# Altium PCB KS1500-ST - V1.0.PcbDoc
Units mil, origin at the board's own origin, x right, y up, seen from the top; angles counter-clockwise.
Board outline 4820 x 1660 mil, 2 copper layers (Top Layer, Bottom Layer); 72 components, 97 nets, 319 pads, 118 vias.
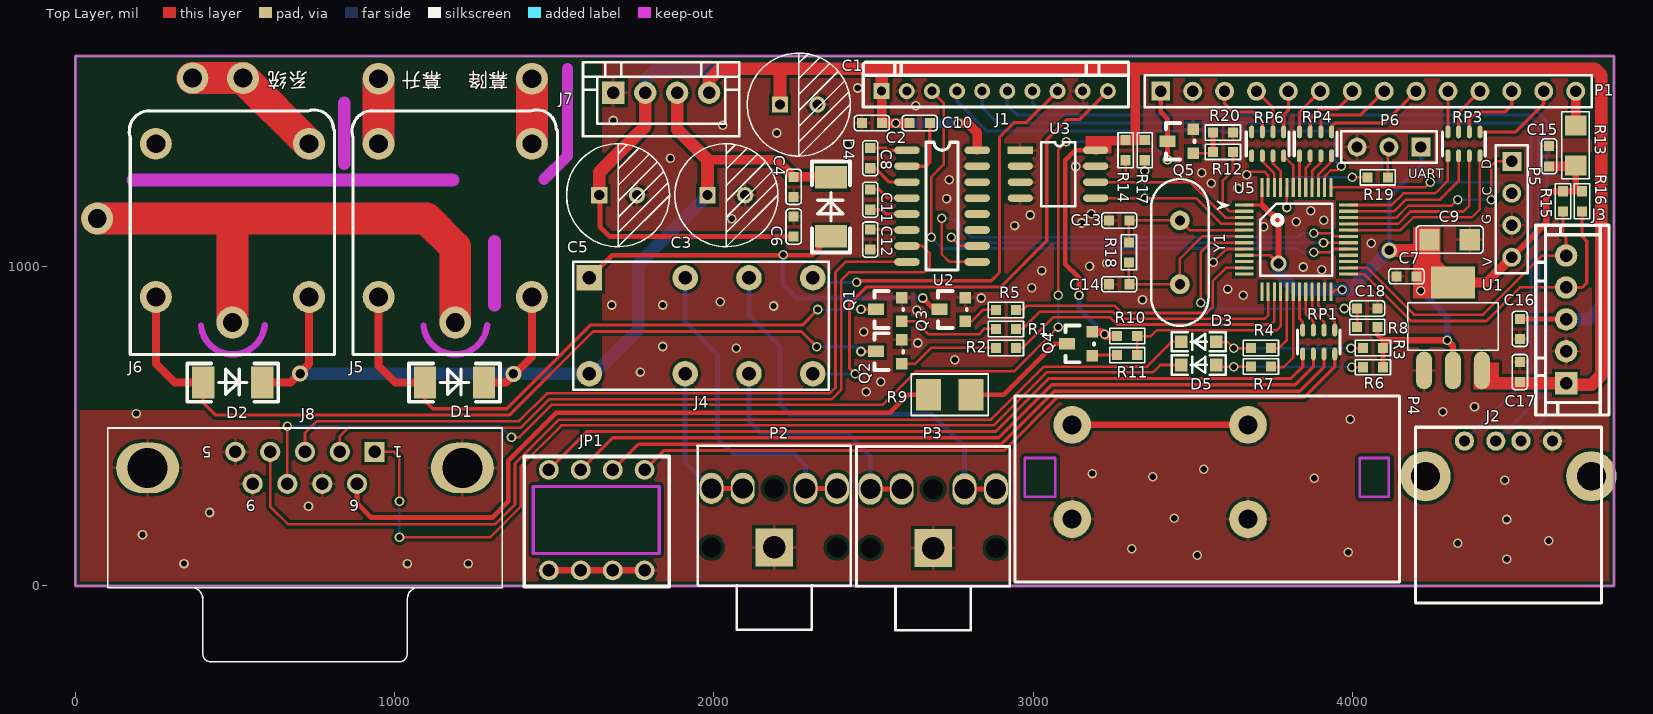
[diagram p0: Top Layer view]
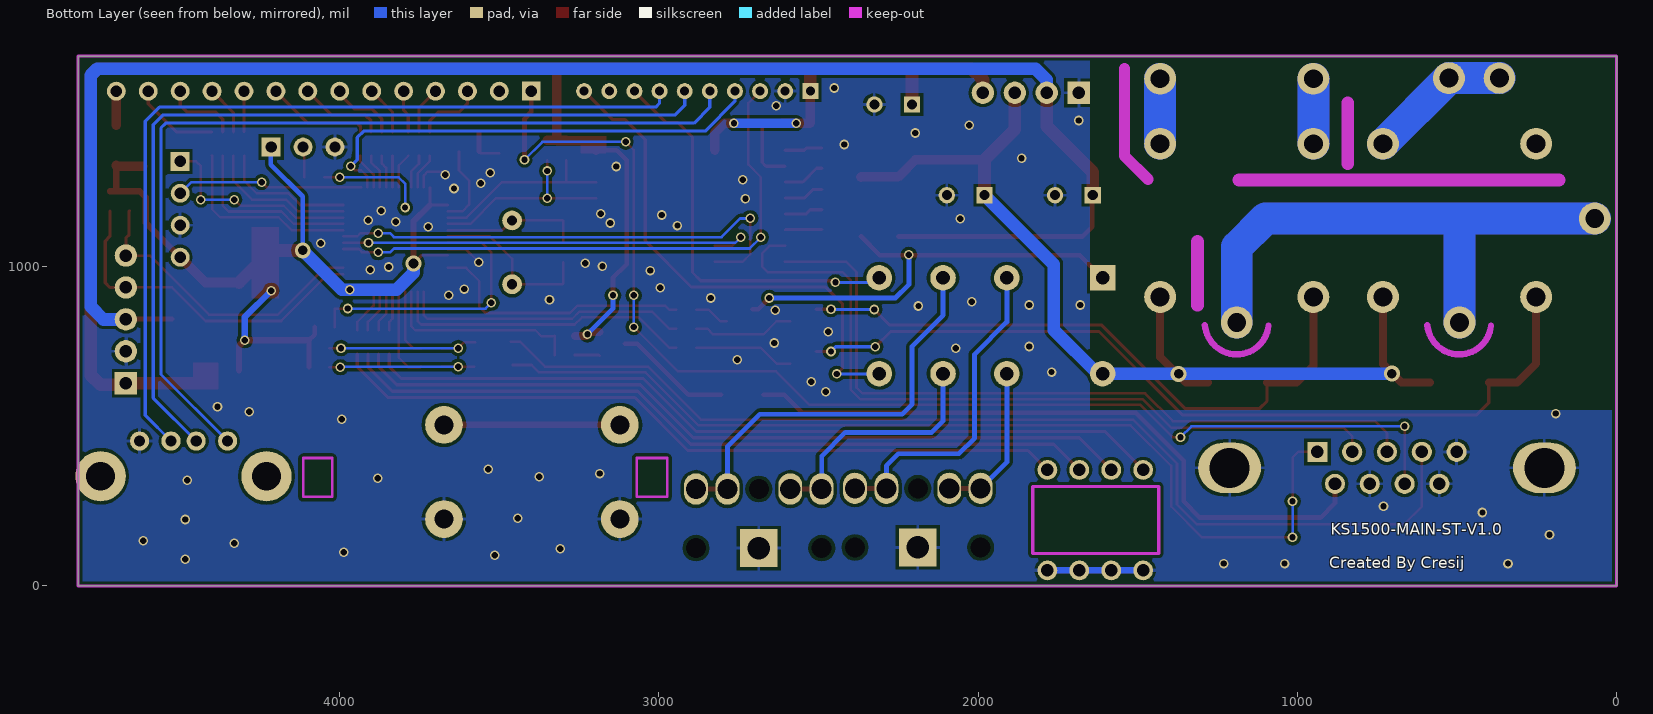
[diagram p1: Bottom Layer view, seen from below]

## Layer stack, top to bottom
Top Layer: signal copper 1.4
Dielectric: dielectric 12.6, FR-4, Dk 4.8
Bottom Layer: signal copper 1.4

## Board outline
0,0 0,1660 4820,1660 4820,0

## Design rules (kind name [scope] priority, off if disabled: settings)
Clearance [All] p1: gap=9
HoleSize [All] p1: absolutevalues=TRUE maxlimit=150 minlimit=1 maxpercent=80.000 minpercent=20.000
PolygonConnect [All vs IsVia] p1: connectstyle=Direct reliefconductorwidth=10 reliefentries=4 polygonreliefangle="90 Angle"
RoutingVias [All] p1: holewidth=28 width=50 viastyle="Through Hole" minholewidth=28 minwidth=50 maxholewidth=28 maxwidth=50
SilkscreenOverComponentPads [All] p1: minsilkscreentomaskgap=10
SolderMaskExpansion [All] p1: expansion=4
Width [All] p1: maxlimit=100 minlimit=8 preferedwidth=10 minimp=50.000000 maximp=50.000000 favimp=50.000000
26 further rules are at their usual default settings.

## Components (designator, comment, footprint, x,y, rotation, side; value= is the part's Value field where it differs from the comment)
C1 "470uF/25v" RB.4/Q8.2 2266,1514 r0 top locked
C2 "100NF/25V" C0603 2495,1450 r0 top locked
C3 "470uF/25v" RB.4/Q8.2 2039,1230 r0 top locked
C4 "100NF/25V" C0603 2250,1250 r90 top locked
C5 "470uF/25v" RB.4/Q8.2 1700,1230 r0 top locked
C6 "100NF/25V" C0603 2250,1126 r270 top locked
C7 "100NF" C0603 4170,970 r180 top locked
C8 "100NF/25V" C0603 2490,1340 r270 top locked
C9 "10UF" C1206 4305,1085 r0 top locked
C10 "100NF/25V" C0603 2645,1450 r180 top locked
C11 "100NF/25V" C0603 2490,1210 r90 top locked
C12 "100NF/25V" C0603 2490,1085 r270 top locked
C13 "22PF/5%" C0603 3270,1145 r0 top locked
C14 "22PF/5%" C0603 3270,945 r0 top locked
C15 "100NF/25V" C0603 4617,1346 r270 top locked
C16 "100NF/25V" C0603 4525,805 r270 top locked
C17 "100NF/25V" C0603 4525,670 r90 top locked
C18 "100NF/25V" C0603 4047,869 r0 top locked
D1 "IN4007" M7 1195,634 r0 top locked
D2 "IN4007" M7 500,634 r0 top locked
D3 "IN4148" SOD-123 3574,765 r180 top locked
D4 "IN4007" M7 2370,1195 r90 top locked
D5 "IN4148" SOD-123 3574,692.14 r180 top locked
J1 "Header 10" JP10-2.0 2880,1550 r0 top locked
J2 "USB" USB-1 4351.54,453.87 r0 top locked
J3 "Header 5" JP5-2.54 4670,635 r90 top locked
J4 "HK19F-DC 12V-SHG" RELAY-DPDT 1960,815 r180 top locked
J5 "RELAY-NT73-2C-10" RELAY-NT73-2C-10 1242,1133 r90 top locked
J6 "RELAY-NT73-2C-10" RELAY-NT73-2C-10 544,1133 r90 top locked
J7 "POWER" JP4-2.54 1985,1545 r0 top locked
J8 "DB9" DB9-RS232 643,137 r90 top locked
JP1 "SW-DIP4" SW-DIP4 1483,48.59 r0 top locked
P1 "Header 14" HDR1X14 3400,1550 r0 top locked
P2 "AUDIO-IN" AUDIO-D 2189,213 r0 top locked
P3 "AUDIO-OUT" AUDIO-D 2687,211 r0 top locked
P4 "VIDEO" VIDEO-1 3398,357 r0 top locked
P5 "DOWNLOAD" HDR1X4 4500,1330 r270 top locked
P6 "Download" HDR1X3 4215,1375 r180 top locked
Q1 "S8050" SOT23-S8050/8550 2562,873 r90 top locked
Q2 "S8050" SOT23-S8050/8550 2562,741 r90 top locked
Q3 "S8050" SOT23-S8050/8550 2761,873 r90 top locked
Q4 "S8550" SOT23-S8050/8550 3160,765 r90 top locked
Q5 "S8050" SOT23-S8050/8550 3475,1400 r90 top locked
R1 "4.7K" R0603 2915,805 r180 top locked
R2 "4.7K" R0603 2915,745.5 r180 top locked
R3 "10K" R0603 4065,745 r180 top locked
R4 "1K" R0603 3714,745 r0 top locked
R5 "4.7K" R0603 2915,864.5 r180 top locked
R6 "10K" R0603 4065,685 r180 top locked
R7 "1K" R0603 3714,687.14 r0 top locked
R8 "10K" R0603 4047,811 r180 top locked
R9 "100R" R1210 2739,599 r180 top locked
R10 "4.7K" R0603 3295,783 r180 top locked
R11 "4.7K" R0603 3295,723 r180 top locked
R12 "4.7K" R0603 3595,1360 r180 top locked
R13 "6R8" R1206 4700,1380 r270 top locked
R14 "10K" R0603 3290,1365 r270 top locked
R15 "4.7K" R0603 4660,1205 r90 top locked
R16 "4.7K" R0603 4720,1205 r90 top locked
R17 "10K" R0603 3350,1365 r270 top locked
R18 "1M/NC" R0603 3300,1045 r90 top locked
R19 "10K" R0603 4080,1280 r0 top locked
R20 "47K" R0603 3595,1420 r0 top locked
RP1 "1K/RES-4" RP2 3895,764 r90 top locked
RP3 "3.3K/RES-4" RP2 4350,1385 r270 top locked
RP4 "1K/RES-4" RP2 3885,1385 r270 top locked
RP6 "1K/RES-4" RP2 3735,1385 r270 top locked
U1 "LM1117-3.3" SOT223 4225,675 r0 top locked
U2 "MAX232" SO-16 2605,1365 r0 top locked
U3 "24C64" SOP8-4.4*5-1.27 2960,1365 r0 top locked
U5 "STM32F030C8T6" LQFP48/0.5/9*9 3825,1085 r0 top locked
Y1 "8.000MHz/2Pin" XTAL-0.2 3460,1145 r270 top locked

## Footprints (in the part's own frame and the unit in brackets; to place one, negate y for a bottom-side part, rotate by r counter-clockwise, add the part's x,y. Pads: shape width x height; smd on the part's side, far side on the other; paste and mask are expansions set on the pad)
AUDIO-D [mm]
  round 0 hole 1.6: 0(-5,-2.349) 0(0,2.349) 0(5,-2.349)
  oval 1.9x2.5 hole 1.6: 1(-5,2.349) 1(-2.5,2.349) 2(2.5,2.349) 2(5,2.349)
  rect 3x3 hole 1.8: 3(0,-2.349)
  silkscreen extent -6.12,-8.89 6.1,5.75
C0603 [mm]
  rect 0.8x0.8 smd: 1(-0.8,0) 2(0.8,0)
  silkscreen extent -1.4,-0.61 1.4,0.61
C1206 [mm]
  rect 1.6x1.7 smd: 1(-1.6,0) 2(1.6,0)
  silkscreen extent -2.67,-1.09 2.67,1.09
DB9-RS232 [mm]
  oval 4x5 hole 3.2: 0(5.912,10.591) 0(5.912,-14.453)
  rect 1.6x1.6 hole 1: 1(7.182,-7.468)
  round 1.6 hole 1: 2(7.182,-4.699) 3(7.182,-1.931) 4(7.182,0.838) 5(7.182,3.606) 6(4.642,-6.071) 7(4.642,-3.302) 8(4.642,-0.534) 9(4.642,2.235)
  silkscreen extent -9.51,-17.63 9.09,13.77
HDR1X3 [mm] "Connector; Header; 3 Position"
  rect 1.5x1.5 hole 0.9: 1(0,0)
  round 1.5 hole 0.9: 2(2.54,0) 3(5.08,0)
  silkscreen extent -1.27,-1.27 6.35,1.27
HDR1X4 [mm] "Connector; Header; 4 Position"
  rect 1.5x1.5 hole 0.9: 1(0,0)
  round 1.5 hole 0.9: 2(2.54,0) 3(5.08,0) 4(7.62,0)
  silkscreen extent -1.27,-1.27 8.89,1.27
HDR1X14 [mm] "Connector; Header; 14 Position"
  rect 1.5x1.5 hole 0.9: 1(0,0)
  round 1.5 hole 0.9: 2(2.54,0) 3(5.08,0) 4(7.62,0) 5(10.16,0) 6(12.7,0) 7(15.24,0) 8(17.78,0) 9(20.32,0) 10(22.86,0) 11(25.4,0) 12(27.94,0) 13(30.48,0) 14(33.02,0)
  silkscreen extent -1.27,-1.27 34.29,1.27
JP4-2.54 [mil]
  rect 70x70 hole 39.37: 1(-300,0)
  round 70 hole 39.37: 2(-200,0) 3(-100,0) 4(0,0)
  silkscreen extent -395,-136 95,95
JP5-2.54 [mil]
  rect 70x70 hole 39.37: 1(0,0)
  round 70 hole 39.37: 2(100,0) 3(200,0) 4(300,0) 5(400,0)
  silkscreen extent -100,-134 495,95
JP10-2.0 [mil]
  rect 50x50 hole 28: 1(-354.33,0)
  round 50 hole 28: 2(-275.59,0) 3(-196.85,0) 4(-118.11,0) 5(-39.37,0) 6(39.37,0) 7(118.11,0) 8(196.85,0) 9(275.59,0) 10(354.33,0)
  silkscreen extent -412,-50 419,91
LQFP48/0.5/9*9 [mm]
  rect 1.5x0.25 smd: 1(-4.15,2.75) 2(-4.15,2.25) 3(-4.15,1.75) 4(-4.15,1.25) 5(-4.15,0.75) 6(-4.15,0.25) 7(-4.15,-0.25) 8(-4.15,-0.75) 9(-4.15,-1.25) 10(-4.15,-1.75) 11(-4.15,-2.25) 12(-4.15,-2.75) 25(4.15,-2.75) 26(4.15,-2.25) 27(4.15,-1.75) 28(4.15,-1.25) 29(4.15,-0.75) 30(4.15,-0.25) 31(4.15,0.25) 32(4.15,0.75) 33(4.15,1.25) 34(4.15,1.75) 35(4.15,2.25) 36(4.15,2.75)
  rect 0.25x1.5 smd: 13(-2.75,-4.15) 14(-2.25,-4.15) 15(-1.75,-4.15) 16(-1.25,-4.15) 17(-0.75,-4.15) 18(-0.25,-4.15) 19(0.25,-4.15) 20(0.75,-4.15) 21(1.25,-4.15) 22(1.75,-4.15) 23(2.25,-4.15) 24(2.75,-4.15) 37(2.75,4.15) 38(2.25,4.15) 39(1.75,4.15) 40(1.25,4.15) 41(0.75,4.15) 42(0.25,4.15) 43(-0.25,4.15) 44(-0.75,4.15) 45(-1.25,4.15) 46(-1.75,4.15) 47(-2.25,4.15) 48(-2.75,4.15)
  silkscreen extent -6.3,-2.86 2.86,3.04
M7 [mil]
  rect 70x100 smd: 1(-100,3) 2(85,3)
  silkscreen extent -150,-57 135,63
R0603 [mm]
  rect 0.8x0.8 smd: 1(-0.8,0) 2(0.8,0)
  silkscreen extent -1.4,-0.61 1.4,0.61
R1206 [mm]
  rect 1.6x1.7 smd: 1(-1.6,0) 2(1.6,0)
  silkscreen extent -2.67,-1.09 2.67,1.09
R1210 [mm]
  rect 2x2.5 smd: 1(-1.7,0) 2(1.7,0)
  silkscreen extent -3.05,-1.65 3.05,1.65
RB.4/Q8.2 [mm]
  rect 1.3x1.3 hole 0.8: 1(-1.5,-0.152)
  round 1.3 hole 0.8: 2(1.5,-0.152)
  silkscreen extent -4.1,-4.25 4.1,3.95
RELAY-DPDT [mil]
  round 80 hole 43: 1(-350,150) 2(-150,150) 3(50,150) 4(-350,-150) 5(-150,-150) 6(50,-150) 7(350,150)
  rect 80x80 hole 43: 8(350,-150)
  silkscreen extent -400,-200 400,200
RELAY-NT73-2C-10 [mm]
  round 2.54 hole 1.5: 1(-7.818,1.326) 2(6.406,-4.77) 3(6.406,7.422) 4(-5.786,-4.77) 5(-5.786,7.422)
  silkscreen extent -10.36,-6.8 9.1,9.53
RP2 [mm]
  oval 1.016x0.4 smd: 1(-0.95,1.275) 2(-0.95,0.425) 3(-0.95,-0.425) 4(-0.95,-1.275) 5(0.95,-1.275) 6(0.95,-0.425) 7(0.95,0.425) 8(0.95,1.275)
  silkscreen extent -0.95,-1.7 0.95,1.7
SO-16 [mil]
  oval 80x24 smd: 1(0,0) 2(0,-50) 3(0,-100) 4(0,-150) 5(0,-200) 6(0,-250) 7(0,-300) 8(0,-350) 9(220,-350) 10(220,-300) 11(220,-250) 12(220,-200) 13(220,-150) 14(220,-100) 15(220,-50) 16(220,0)
  silkscreen extent 60,-375 160,25
SOD-123 [mm]
  rect 1x1 smd: 1(0,0) 2(2.8,0)
  silkscreen extent -0.76,-0.76 3.56,0.76
SOP8-4.4*5-1.27 [mm]
  rect 2x0.6 smd: 1(0,0)
  oval 2x0.6 smd: 2(0,-1.27) 3(0,-2.54) 4(0,-3.81) 5(6,-3.81) 6(6,-2.54) 7(6,-1.27) 8(6,0)
  silkscreen extent 1.68,-4.44 4.37,0.64
SOT23-S8050/8550 [mil]
  rect 36x36 smd: 1(-44.52,-26.15) 2(30.48,-26.15)
  rect 36x50 smd: 3(-6.52,53.85)
  silkscreen extent -65,-31 50,59
SOT223 [mm]
  oval 1.27x3 smd: 1(0,0) 2(2.3,0) 3(4.6,0)
  rect 3.5x2.54 smd: 4(2.3,7)
  silkscreen extent -1.3,1.6 5.9,5.4
SW-DIP4 [mil]
  round 62 hole 39: 1(0,0) 2(100,0) 3(200,0) 4(300,0) 5(300,314.96) 6(200,314.96) 7(100,314.96) 8(0,314.96)
  Keep-Out Layer lines w10: -49,52.96 -49,262.96 346,262.96 346,52.96 -49,52.96
  silkscreen extent -77,-50 377,357
USB-1 [mm]
  round 4 hole 2.3: 0(-3.1,-2.8) 0(10.1,-2.8)
  round 1.524 hole 0.9: 1(0,0) 2(2.5,0) 3(4.5,0) 4(7,0)
  silkscreen extent -3.9,-12.9 10.9,1.1
VIDEO-1 [mm]
  round 3 hole 1.5: 1(-7,3.75) 2(7,3.75) 3(-7,-3.75) 4(7,-3.75)
  Keep-Out Layer lines w0.203: -8.359,1.111 -10.772,1.111 -10.772,-1.987 -8.334,-1.987 -8.334,1.086 ; 18.184,1.111 15.898,1.111 15.898,-1.987 ; 18.209,1.086 18.209,-1.987 ; 15.898,-1.987 18.209,-1.987 ; 15.898,-1.987 18.209,-1.987
  silkscreen extent -11.55,-8.75 19.05,6.04
XTAL-0.2 [mil]
  round 62 hole 32: 1(0,0) 2(200,0)
  silkscreen extent -130,-90 330,90

## Part data
C1 C3 C5: library part "Cap Pol1", "Polarized Capacitor (Radial)"
C2 C4 C6 C13 C14: library part Cap, "Capacitor"
C7 C9: library part CAP, "Capacitor"
C8 C10 C11 C12 C15 C16 C17 C18: library part "Cap Semi", "Capacitor (Semiconductor SIM Model)"
D1 D2 D3 D4 D5: library part Diode, "Default Diode"
J1: "Header, 10-Pin"
J2 J7 P4 P5: library part "Header 4", "Header, 4-Pin"
J3: "Header, 5-Pin"
JP1: "DIP Switch"
P1: "Header, 14-Pin"
P2 P3 P6: library part "Header 3", "Header, 3-Pin"
R1 R2 R3 R4 R5 R6 R7 R8 R9 R10 R11 R12 R13 R14 R15 R16 R17 R18 R19 R20: library part Res1, "Resistor"
RP1 RP3 RP4 RP6: library part RES-4
U1: library part LM117
U5: library part STM32F030CX-LQFP48
Y1: library part CRYSTAL, "Crystal"

## Free pads (board coordinates)
  round 100 hole 59.05: 1(68,1151) 2(525,1591) 3(949.78,1589) 4(1429.78,1589)
  round 98.42 hole 59.05: 5(367,1591)

## Via types
v1: diameter 30, hole 20, Top Layer to Bottom Layer, 114 vias
v2: diameter 50, hole 30, Top Layer to Bottom Layer, 4 vias

## Nets (pads, with @x,y where several pads share a name; then routed paths per layer and width w, separated by ;. In a path a pad name is that pad's centre, name@x,y a point inside that pad or via, vN(x,y) a via of type N, cw(c..) or ccw(c..) an arc to the next point about the centre after c; other vN are vias at no path point)
232RX1: J8.3 U2.8 | length 2379
  Top Layer w8: J8.3 719.02,479 756.02,516 1390.09,516 1477.09,603 2362.54,603 2381,621.46 2381,983 2413,1015 U2.8
232TX1: J8.2 U2.7 | length 2442.6
  Top Layer w8: J8.2 828.02,469 855.02,496 1395.54,496 1484.54,585 2370,585 2399,614 2399,957 2424,982 2659,982 2677,1000 2677,1042 2654,1065 U2.7
+3V3: C7.1 C9.1 C15.2 P5.4 P6.1 R3.1 R6.1 R8.1 R13.2 R15.2 R16.2 U1.2 U1.4 U5.1 U5.9 U5.24 U5.48 | length 2950.1
  Top Layer w9: U5.9 3743.21,1035.79 v2(3769,1010) ; U5.1 3661.88,1193 3697.15,1193 3718,1193 3716.73,1194.27 U5.48 ; U5.24 3941.61,921.61 3948,928 v1(3969,928)
  Top Layer w15: R8.1 4078.5,787.5 4096.5,769.5 R3.1 R6.1
  Top Layer w20: 3718,1193 3769,1142 v2(3769,1010) ; 4096.5,769.5 v1(4297.5,769.5) 4315.55,751.45 U1.2 ; P5.4 4608,1138 4608,1218 4626.5,1236.5 R15.2 4700,1236.5 ; R13.2 4700,1236.5 ; R16.2 4700,1236.5
  Top Layer w30: U1.4 4420.59,950.59 P5.4 ; C15.2 4697.5,1314.5 R13.2
  Top Layer w40: v2(4116,1051) 4215.14,1051 4242.01,1024.13 ; C9.1 4242.01,1024.13 ; U1.4 4242.01,1024.13
  Bottom Layer w15: v2(4116,1051) 4116,1220 4216,1320 4216,1374 P6.1
  Bottom Layer w20: v1(4215,925) 4297.5,842.5 v1(4297.5,769.5)
  Bottom Layer w40: v2(3769,1010) 3769,981 3822,928 v1(3969,928) 3993,928 v2(4116,1051)
+5V: C1.1 C2.2 C10.2 C17.1 J1.1 J3.1 J7.4 Q4.2 R10.2 R14.1 R17.1 U1.3 U2.16 U3.8 | length 6115.5
  Top Layer w15: v1(3144,910) 3144,965 3101,1008 3101,1334 3132,1365 U3.8
  Top Layer w25: Q4.2 3214.52,795.48 3227,783 R10.2
  Top Layer w30: J1.1 2526.5,1549.17 C2.2 v1(2570,1450) C10.2 ; v1(2765,1450) 2795,1450 2825,1420 U2.16 ; U3.8 3196.22,1381.22 3210,1395 3318.5,1395 3320,1396.5 ; R14.1 3320,1396.5 ; 3315,1620 3320,1615 3320,1396.5 ; R17.1 3320,1396.5
  Top Layer w40: J7.4 1985,1585 2020,1620 2210,1620 ; C1.1 2206.94,1616.94 2210,1620 ; J1.1 2525.67,1619.33 2525,1620 ; U1.3 4446.1,635 J3.1 4675,630 4750,630 4780,660 4780,1600 4760,1620 3315,1620 2525,1620 ; 2210,1620 2525,1620
  Bottom Layer w15: v1(3144,910) 3144,868 v1(3224,788)
  Bottom Layer w30: v1(2570,1450) v1(2765,1450)
+12V: C3.1 C4.2 D1.2 D2.2 D4.2 J4.7 J5.4 J6.4 J7.3 | length 3151.1
  Top Layer w25: D2.2 674,637 731.78,694.78 J6.4 ; D1.2 1349,637 1429.78,717.78 J5.4
  Top Layer w30: 1979.94,1335.06 2196.44,1335.06 C4.2 2365.5,1281.5 D4.2
  Top Layer w40: J7.3 1885,1430 1979.94,1335.06 C3.1
  Bottom Layer w40: v2@702.89,665.89 v2(703.78,665) J4.7 1626,665 1763,802 1763,1007.06 C3.1
  other v2: 1372,664
-5V: C5.1 C6.2 C16.1 J3.3 J7.2 | length 5155.1
  Top Layer w15: C5.1 1643,1221.94 1643,1125 1673.5,1094.5 C6.2 ; C16.1 4668.5,836.5 J3.3
  Top Layer w40: C5.1 1640.94,1295.94 1785,1440 J7.2
  Bottom Layer w40: J7.2 1785,1585 1820,1620 4760,1620 4780,1600 4780,875 4740,835 J3.3
AC220V: J5.1 J6.1 pad.1 | length 3445.8
  Top Layer w100: pad.1 497,1151 ; J6.1 491.78,1145.78 497,1151 ; J5.1 1189.78,1061.22 1100,1151 497,1151
  Bottom Layer w100: pad.1 497,1151 ; J6.1 491.78,1145.78 497,1151 ; J5.1 1189.78,1061.22 1100,1151 497,1151
AUDIO_CON: R5.1 U5.11 | length 835.9
  Top Layer w8: R5.1 2967,864.5 2980.04,877.54 3256.46,877.54 3279,855 3544,855 3563,874 3563,955 3604.42,996.42 U5.11
CPU_RXD1: U2.9 U5.31 | length 1541.9
  Top Layer w8: v1(2714,1152) 2714,1039 2738,1015 U2.9 ; v1(3880,1105) 3935,1105 3945.16,1094.84 U5.31
  Bottom Layer w8: v1(2714,1152) 2715,1151 2746,1151 2804,1093 3830,1093 3842,1105 v1(3880,1105)
CPU_RXD2: U5.13
CPU_TXD1: U2.10 U5.30 | length 1343.7
  Top Layer w8: v1(2744,1092) 2771,1065 U2.10 ; v1(3910,1075) 3910.16,1075.16 U5.30
  Bottom Layer w8: v1(2744,1092) 2761,1075 v1(3910,1075)
CPU_TXD2: U5.12
DOWN: J5.3 pad.3 | length 407.6
  Top Layer w100: J5.3 pad.3
  Bottom Layer w100: J5.3 pad.3
GND: C1.2 C2.1 C3.2 C4.1 C5.2 C6.1 C7.2 C9.2 C12.2 C13.1 C14.1 C15.1 C16.2 C17.2 C18.2 J1.2 J1.9 J2.4 J3.2 J7.1 J8.0 J8.5 J8.7 J8.9 JP1.1 JP1.2 JP1.3 JP1.4 P1.2 P2.3 P3.3 P4.3 P4.4 P5.3 P6.3 Q1.2 Q2.2 Q3.2 Q5.2 R20.2 U1.1 U2.15 U3.1 U3.2 U3.3 U3.4 U3.7 U5.8 U5.23 U5.47 | length 827.8
  Top Layer w8: v1(3564,1014) 3605.47,1055.47 U5.8 ; v1(3670,1288) 3679.77,1297.77 3724.77,1297.77 3736.42,1286.13 U5.47
  Top Layer w20: JP1.1 JP1.4
  Bottom Layer w20: JP1.1 JP1.4
  other v1: 340,70 1040,70 1230,70 4484,83 3515,96 3988,106 3309,116 4331,134 4616,142 210,160 4484,208 3442,212 420,230 730,250 4478,331 3881,337 3375,342 3186,352 3535,365 3994,522 190,540 4284,546 4383,561 2477,608 2523,640 1770,670 2755,709 2070,745 1840,750 2639,761 2469,796 2636,864 2187,877 1680,880 1840,880 2020,890 3343,897 2838,902 3658,911 3610,930 2996,934 3027,988 3905,991 3846,999 3177,1002 3231,1011 4059,1074 3723,1125 2942,1129 3152,1137 3824,1141 3911,1145 2056,1150 2991,1162 3182,1166 3870,1175 2729,1213 3642,1245 3558,1261 2738,1273 3529,1294 3134,1314 1864,1340 2419,1383 2197,1419 2028,1443 1685,1458 2633,1504 2451,1560
IO_CON1: J3.4 R16.1 U5.25 | length 1086.8
  Top Layer w8: U5.25 4037.27,976.73 4184,830 4420,830 4525,935 J3.4
  Top Layer w10: J3.4 4720,935 4735,950 4735,1080 4720,1095 R16.1
IO_CON2: J3.5 R15.1 U5.26 | length 963.7
  Top Layer w8: U5.26 4047.58,996.42 4194,850 4410,850 4595,1035 J3.5 ; R15.1@4658.5,1175 R15.1
  Top Layer w10: R15.1 4660,1100 4670,1090 J3.5
IO_OFF: R4.2 U5.17 | length 211.7
  Top Layer w8: R4.2 3770,745 3795.47,770.47 U5.17
IO_ON: R7.2 U5.18 | length 289.5
  Top Layer w8: R7.2 3747.64,685 3785,685 3815.16,715.16 U5.18
IR_IN: J1.3 U5.29 | length 1820.6
  Top Layer w8: v1(2681,1092) 2681,1280.89 2720,1319.89 2720,1513.15 J1.3 ; v1(3880,1045) 3881,1046 3931,1046 3940.47,1055.47 U5.29
  Bottom Layer w8: v1(2681,1092) 2716,1057 3830,1057 3842,1045 v1(3880,1045)
IR_LED: J1.4 U5.38 | length 1459.5
  Top Layer w8: U5.38 3913.58,1283.13 3932.73,1302.27 3952.27,1302.27 v1(3965,1315)
  Bottom Layer w10: J1.4 2761.89,1518.11 2855,1425 3925,1425 3945,1405 3945,1335 v1(3965,1315)
IR_OUT: R10.1 R11.1 U5.16 | length 631.3
  Top Layer w8: R11.1 R10.1 3327.5,782 3368,782 3387,801 3764,801 3775.79,812.79 U5.16
IR_OUT_PORT: J8.6 R9.2 | length 2103.8
  Top Layer w15: J8.6 882.02,258.98 927,214 1305,214 1355.5,264.5 1355.5,392.36 1505.64,542.5 2550.5,542.5 2607,599 R9.2
KEY_IN1: RP4.8 U5.39 | length 116.3
  Top Layer w8: U5.39 3893.9,1288.9 3935.2,1330.2 RP4.8
KEY_IN2: RP4.7 U5.40 | length 110.6
  Top Layer w8: U5.40 3874.21,1299.21 3901.73,1326.73 RP4.7
KEY_IN3: RP4.6 U5.41 | length 104.9
  Top Layer w8: U5.41 3854.53,1309.53 3868.27,1323.27 RP4.6
KEY_IN4: RP4.5 U5.42 | length 99.2
  Top Layer w8: RP4.5 RP4.5 U5.42
KEY_OUT1: RP6.8 U5.43 | length 111.6
  Top Layer w8: RP6.8 3815.16,1317.64 U5.43
KEY_OUT2: RP6.7 U5.45 | length 109.2
  Top Layer w8: RP6.7 3751.73,1323.27 3775.79,1299.21 U5.45
KEY_OUT3: RP6.6 U5.46 | length 114.9
  Top Layer w8: RP6.6 3718.27,1329.73 3756.1,1291.9 U5.46
LAPTOP_IN_L: J1.8 J4.4 | length 1268.6
  Top Layer w10: v1(2447,951) 2452,956 2869,956 2895,982 2895,1405 2942,1452 2978.85,1452 J1.8
  Bottom Layer w10: J4.4 2324,951 v1(2447,951)
LAPTOP_IN_R: J1.10 J4.1 | length 1642.1
  Top Layer w10: v1(2443,664) 2425,682 2425,884 2477,936 2898,936 3043,1081 3043,1398 3106,1461 3145.33,1461 J1.10 J1.10@3224,1550
  Bottom Layer w10: J4.1 2311,664 v1(2443,664)
LED1: RP3.8 U5.32 | length 606.4
  Top Layer w8: U5.32 4151.01,1114.53 4191.48,1155 4375,1155 4400,1180 4400,1347.4 RP3.8
LED2: RP3.7 U5.33 | length 558
  Top Layer w8: U5.33 4144.21,1134.21 4183,1173 4348,1173 4366.73,1191.73 RP3.7
LED3: RP3.6 U5.35 | length 463.4
  Top Layer w8: U5.35 4131.42,1173.58 4167.84,1210 4275,1210 4333.27,1268.27 RP3.6
LED4: RP3.5 U5.36 | length 420.9
  Top Layer w8: U5.36 4123.27,1193.27 4160,1230 4260,1230 4299.8,1269.8 RP3.5
NetC8_1: C8.1 U2.1 | length 117.7
  Top Layer w10: C8.1 2538.5,1371.5 2545,1365 U2.1
NetC8_2: C8.2 U2.3 | length 133
  Top Layer w10: C8.2 2506.5,1308.5 2550,1265 U2.3
NetC10_1: C10.1 U2.2 | length 199.8
  Top Layer w10: U2.2 2665,1315 2676.5,1326.5 C10.1
NetC11_1: C11.1 U2.5 | length 120.6
  Top Layer w10: C11.1 2526.5,1178.5 2540,1165 U2.5
NetC11_2: C11.2 U2.4 | length 126
  Top Layer w10: C11.2 2518.5,1241.5 2545,1215 U2.4
NetC12_1: C12.1 U2.6 | length 115.6
  Top Layer w10: C12.1 2603.5,1116.5 U2.6
NetD1_1: D1.1 J5.5 Q1.3 | length 1993.2
  Top Layer w10: D1.1 1095,579 1119,555 1351,555 1613,817 2277,817 v1(2326,866) ; v1@2461,866.48 Q1.3
  Top Layer w25: J5.5 949.78,689.22 1002,637 D1.1
  Bottom Layer w10: v1(2326,866) 2460,866 v1(2461,867)
NetD2_1: D2.1 J6.5 Q2.3 | length 2703.5
  Top Layer w10: D2.1 400,574 439,535 1359.28,535 1621.28,797 2274,797 v1(2322,749) ; v1(2461,734.48) Q2.3
  Top Layer w25: J6.5 251.78,696.22 311,637 D2.1
  Bottom Layer w10: v1(2322,749) 2446.48,749 v1(2461,734.48)
NetD3_1: D3.1 R3.2 R4.1 | length 519.9
  Top Layer w8: D3.1@3575,764 3610,764 v1(3629,745) R4.1 ; v1(3996,745) R3.2
  Bottom Layer w8: v1(3629,745) v1(3996,745)
NetD3_2: D3.2 J8.4 | length 3359.9
  Top Layer w8: J8.4 610.02,248.98 666.5,192.5 1313.91,192.5 1377,255.59 1377,383.46 1514.54,521 2868.67,521 3034.67,687 3357,687 3435,765 D3.2
NetD4_1: D4.1 J4.8 Q3.3 | length 1426.1
  Top Layer w15: J4.8 1681,1036 2308,1036 D4.1 ; v1(2654,902) 2689.52,866.48 Q3.3
  Bottom Layer w15: v1(2217,1037) 2217,944 2259,902 v1(2654,902)
NetD5_1: D5.1 R6.2 R7.1 | length 508.9
  Top Layer w8: D5.1@3579,687.14 v1(3629,687.14) R7.1 ; v1(3998,685) R6.2
  Bottom Layer w8: v1(3629,687.14) 3995.86,687.14 v1(3998,685)
NetD5_2: D5.2 J8.1 | length 3077.5
  Top Layer w8: J8.1 997.25,419.75 1015,402 v1(1015,265) ; v1(1015,152) 1298.86,152 1395,248.14 1395,376 1522,503 2876.13,503 3042.13,669 3376,669 3399.14,692.14 D5.2@3458.5,692.14
  Bottom Layer w8: v1(1015,152) v1(1015,265)
NetJ1_5: J1.5 J2.1 | length 2864.1
  Bottom Layer w10: J1.5 2840.63,1499.37 2890,1450 4545,1450 4560,1435 4560,662.33 J2.1
NetJ1_6: J1.6 J2.2 | length 2781.5
  Bottom Layer w10: J1.6 2919.37,1505.63 2950,1475 4554.64,1475 4584.5,1445.15 4584.5,588.4 J2.2
NetJ1_7: J1.7 J2.3 | length 2707.9
  Bottom Layer w10: J1.7 2998.11,1511.89 3010,1500 4565,1500 4609.5,1455.5 4609.5,534.66 J2.3
NetJ4_2: J4.2 P3.1 | length 775.6
  Top Layer w15: P3.1@2490.15,303.5 P3.1@2588.58,303.5
  Bottom Layer w15: J4.2 2110,517 2146,481 2416,481 2490.15,406.85 P3.1@2490.15,303.5
NetJ4_3: J4.3 P2.1 | length 492
  Top Layer w15: P2.1@1992.15,305.5 P2.1@2090.58,305.5
  Bottom Layer w15: J4.3 1910,387.65 P2.1@1992.15,305.5
NetJ4_5: J4.5 P3.2 | length 1301
  Top Layer w15: P3.2@2785.42,303.5 P3.2@2883.85,303.5
  Bottom Layer w15: J4.5 2110,848 2207,751 2207,569 2238,538 2684,538 2785.42,436.57 P3.2@2785.42,303.5
NetJ4_6: J4.6 P2.2 | length 1025.6
  Top Layer w15: P2.2@2287.42,305.5 P2.2@2385.85,305.5
  Bottom Layer w15: J4.6 1910,827 2011,726 2011,463 2060,414 2250,414 2287.42,376.57 P2.2@2287.42,305.5
NetJP1_5: JP1.5 RP1.4 | length 2335.9
  Top Layer w10: JP1.5 1843.45,424 2908.85,424 3074.85,590 3848.47,590 3945.2,686.73 RP1.4
NetJP1_6: JP1.6 RP1.3 | length 2402.5
  Top Layer w10: JP1.6 1763.45,444 2900.57,444 3066.57,610 3835,610 3911.73,686.73 RP1.3
NetJP1_7: JP1.7 RP1.2 | length 2469
  Top Layer w10: JP1.7 1683.45,464 2892.28,464 3058.28,630 3821.54,630 3878.27,686.73 RP1.2
NetJP1_8: JP1.8 RP1.1 | length 2535.5
  Top Layer w10: JP1.8 1603.45,484 2884,484 3050,650 3808.07,650 3844.8,686.73 RP1.1
NetP1_3: P1.3 RP6.3 | length 214.7
  Top Layer w10: P1.3 3600,1510 3625,1485 3690,1485 3718.27,1456.73 RP6.3
NetP1_4: P1.4 RP6.2 | length 149
  Top Layer w10: P1.4 3751.73,1498.27 RP6.2
NetP1_5: P1.5 RP6.1 | length 133.7
  Top Layer w10: RP6.1 3785.2,1475.2 3800,1490 P1.5
NetP1_6: P1.6 RP4.4 | length 154.6
  Top Layer w10: RP4.4 3834.8,1484.8 P1.6
NetP1_7: P1.7 RP4.3 | length 214.4
  Top Layer w10: RP4.3 3868.27,1463.27 3900,1495 3955,1495 4000,1540 P1.7
NetP1_8: P1.8 RP4.2 | length 271.2
  Top Layer w10: RP4.2 3901.73,1456.73 3920,1475 4025,1475 P1.8
NetP1_9: P1.9 RP4.1 | length 328.1
  Top Layer w10: RP4.1 3935.2,1440.2 3945,1450 4100,1450 P1.9
NetP1_10: P1.10 RP3.4 | length 127.7
  Top Layer w8: P1.10@4299.8,1549.8 P1.10
  Top Layer w10: RP3.4 P1.10@4299.8,1549.8
NetP1_11: P1.11 RP3.3 | length 155.2
  Top Layer w10: RP3.3 4333.27,1483.27 P1.11
NetP1_12: P1.12 RP3.2 | length 235.5
  Top Layer w10: RP3.2 4366.73,1461.73 4390,1485 4480,1485 4500,1505 P1.12
NetP1_13: P1.13 RP3.1 | length 276.1
  Top Layer w10: RP3.1 4512.4,1422.4 4600,1510 P1.13
NetP1_14: P1.14 R13.1 | length 107
  Top Layer w30: R13.1 P1.14
NetP4_1: P4.1 P4.2 | length 551.2
  Top Layer w20: P4.1 P4.2
NetP6_2: P6.2 R19.2 | length 96.5
  Top Layer w8: R19.2 4111.5,1371.5 P6.2
NetQ1_1: Q1.1 R1.2 | length 319.2
  Top Layer w8: Q1.1 2632.52,828.48 2673,788 2830,788 2847,805 R1.2
NetQ2_1: Q2.1 R2.2 | length 315.7
  Top Layer w8: Q2.1 2631.48,696.48 2680.5,745.5 R2.2
NetQ3_1: Q3.1 R5.2 | length 111.3
  Top Layer w8: Q3.1 2807.48,828.48 2843.5,864.5 R5.2
NetQ4_1: Q4.1 R11.2 | length 78.4
  Top Layer w8: Q4.1 Q4.1@3188.67,723
  Top Layer w10: Q4.1@3188.67,723 R11.2
NetQ4_3: Q4.3 R9.1 | length 366.3
  Top Layer w15: R9.1 2908,599 3067.48,758.48 Q4.3
NetQ5_1: Q5.1 R12.2 R20.1 | length 124.2
  Top Layer w8: Q5.1 3558.98,1355.48 R12.2
  Top Layer w15: R12.2 R20.1
NetR19_1: R19.1 U5.44 | length 398.9
  Top Layer w8: v1(3795.47,1185.47) U5.44 ; v1(4000,1280) R19.1
  Bottom Layer w8: v1(3795.47,1185.47) 3795.47,1260.32 3815.16,1280 v1(4000,1280)
NRST: C18.1 R8.2 U5.7 | length 862.5
  Top Layer w8: v1(3525,887) 3525,1044 3556.16,1075.16 U5.7 ; v1(3975,869) C18.1 R8.2
  Bottom Layer w8: v1(3525,887) 3543,869 v1(3975,869)
OSC_IN: C13.2 R18.2 U5.5 Y1.1 | length 441.9
  Top Layer w8: R18.2 3300,1143.5 C13.2 Y1.1 3490.47,1114.53 U5.5
OSC_OUT: C14.2 R18.1 U5.6 Y1.2 | length 538.2
  Top Layer w8: R18.1 3300,946.5 C14.2 Y1.2 3460,1025 3529.84,1094.84 U5.6
PC_CON: R12.1 U5.2 | length 254
  Top Layer w8: R12.1 3626.5,1301.5 3595,1270 3595,1194.26 3615.68,1173.58 U5.2
PC_PORT: J8.8 P1.1 Q5.3 | length 3908.1
  Top Layer w8: J8.8 v1(664.02,499.98) ; v1(1366,466) 1391,466 1492,567 2528,567 2633,672 2940,672 v1(3079,811) ; v1(3079,910) 3079,1366 v1(3104,1391)
  Top Layer w15: P1.1 3400,1485 3421.15,1463.85 Q5.3 v1(3421.15,1335.15)
  Bottom Layer w8: v1(664.02,499.98) 1332.02,499.98 v1(1366,466) ; v1(3079,811) v1(3079,910) ; v1(3104,1391) 3365.3,1391 v1(3421.15,1335.15) v1@3420,1334
RELAY_SCREEN: R2.1 U5.15 | length 954.8
  Top Layer w8: R2.1 2967,745.5 3063.04,841.54 3241.54,841.54 3264.09,819 3745,819 3756.1,830.1 U5.15
RELAY_SYS: R1.1 U5.14 | length 900.4
  Top Layer w8: R1.1 2967,805 3021.54,859.54 3249,859.54 3271.54,837 3726,837 3736.42,847.42 U5.14
SCL: R14.2 U3.6 U5.3 | length 579.9
  Top Layer w8: U3.6 3290,1265 ; R14.2 3290,1265 ; U5.3 3602.72,1153.9 3491.61,1265 3290,1265
SDA: R17.2 U3.5 U5.4 | length 617.4
  Top Layer w8: U3.5 v1(3350,1215) 3510,1215 3590.79,1134.21 U5.4 ; v1(3350,1300) R17.2
  Bottom Layer w8: v1(3350,1215) v1(3350,1300)
SW_IN1: RP1.8 U5.19 | length 124.3
  Top Layer w8: U5.19 3834.84,837.16 3844.8,827.2 RP1.8
SW_IN2: RP1.7 U5.20 | length 130
  Top Layer w8: U5.20 3854.53,852.47 3878.27,828.73 RP1.7
SW_IN3: RP1.6 U5.21 | length 135.8
  Top Layer w8: U5.21 3874.21,864.79 3911.73,827.27 RP1.6
SW_IN4: RP1.5 U5.22 | length 141.5
  Top Layer w8: U5.22 3893.9,878.1 3945.2,826.8 RP1.5
SYSTEM: J6.2 pad.2 pad.5 | length 900
  Top Layer w100: pad.5 pad.2 730.78,1385.22 J6.2
  Bottom Layer w100: pad.5 pad.2 730.78,1385.22 J6.2
TCK: P5.2 U5.37 | length 588.1
  Top Layer w8: U5.37 4228.39,1248.39 v1(4245,1265)
  Bottom Layer w8: v1(4245,1265) 4465,1265 P5.2
TMS: P5.1 U5.34 | length 646.1
  Top Layer w8: U5.34 4138.44,1153.9 4175.54,1191 4311,1191 v1(4330,1210) ; v1(4435,1210) 4435,1315 4450,1330 P5.1
  Bottom Layer w8: v1(4330,1210) v1(4435,1210)
UP: J5.2 pad.4 | length 407.6
  Top Layer w100: J5.2 pad.4
  Bottom Layer w100: J5.2 pad.4
pads on no net: J2.0 J6.3 P2.0 P3.0 RP6.4 RP6.5 U2.11 U2.12 U2.13 U2.14 U5.10 U5.27 U5.28

## Polygon pours and split planes (outlines as drawn)
GND on Top Layer "Top Layer-No Net" (solid, remove dead copper, pour order 2): 0,0 0,550 290,550 1650,550 1650,860 1650,1660 4820,1660 4820,0
GND on Bottom Layer "Top Layer-No Net" (solid, remove dead copper, pour order 4): 0,0 0,550 1650,550 1650,1660 4820,1660 4820,0

## Keep-outs
Keep-Out Layer:
  lines w8: 3068,402 3070,400 3070,279 2974,279 2974,401 3069,401 ; 4114,401 4024,401 4024,279 ; 4115,400 4115,279 ; 4024,279 4115,279 ; 4024,279 4115,279
  lines w10: 0,0 0,1660 4820,1660 4820,0 80,0 0,0
  lines w20: 393.26,815.4 ccw(c492.78,825.22) 592.45,817.13 ; 1090.26,815.4 ccw(c1189.78,825.22) 1289.45,817.13
  lines w35: 1468,1274 1541,1347 1541,1621
  lines w40: 180,1272 1183,1272 ; 842,1323 842,1514 ; 1313,879 1313,1079

## Other copper
Top Layer:
  rectangle net +5V: 3165,1355 3245,1410
  rectangle net +5V: 4380,615 4460,700
  rectangle net +3V3: 4191,901 4277,1124

## Silkscreen, mask and mechanical layers (free items; w line width, h text height)
Top Overlay:
  text "系统" at 729,1624 h80 r180
  text "幕升" at 1149,1624 h80 r180
  text "幕降" at 1357,1623 h80 r180
  text "D" at 4435,1305 h30 r90
  text "UART" at 4175,1277 h30
  text "C" at 4437,1222 h30 r90
  text "G" at 4436,1133 h30 r90
  text "V" at 4439,1002 h30 r90
Bottom Overlay:
  text "KS1500-MAIN-ST-V1.0" at 895,160 h35
  text "Created By Cresij" at 900,55 h35

## Text inside footprints (layer, text, board x,y; h text height)
J8: Top Overlay "1" at 1025.02,436.75 h35 r180; Top Overlay "5" at 427.02,436.75 h35 r180; Top Overlay "6" at 889.02,269.75 h35 r180; Top Overlay "9" at 564.02,269.75 h35 r180